# EAGLE board CT_schematic (EAGLE 7.6.0)

Size 100 x 80 mm. Coordinates in mm from the lower left corner, seen from the top.
Outline: 0,0 100,0 100,80 0,80 0,0
Copper layers (1*16): Top 0.035mm / dielectric 1.5mm / Bottom 0.035mm
Design rules "default": minimum track width 10mil, minimum drill 24mil, track to track 8mil, track to pad 8mil, pad to pad 8mil, via to via 8mil, smd to smd 8mil, copper to edge 40mil, drill to drill 8mil, minimum pad ring 10mil, minimum via ring 8mil, stop-mask expansion 4mil, vias tented up to drill 0mil, thermal gap 10mil

## Footprints (pad centres in the part's own frame; a part is rotated, then mirrored left to right if it is on the bottom)
C0603 = smd 0.8 x 0.8: 1 -0.762,0; 2 0.762,0
C0402 = smd 0.5 x 0.5: 1 -0.508,0; 2 0.508,0
C0805 = smd 1.2 x 1.3: 1 -1.016,0; 2 1.016,0
C1206 = smd 1.3 x 1.6: 1 -1.524,0; 2 1.524,0
L0603 = smd 0.8 x 0.8: 1 -0.762,0; 2 0.762,0
L0806 = smd 1.016 x 1.524: 1 -0.889,0; 2 0.889,0
R0603 = smd 0.8 x 0.8: 1 -0.762,0; 2 0.762,0
LQFP48 = smd 0.3 x 1.2: 1 -2.75,-4.25; 2 -2.25,-4.25; 3 -1.75,-4.25; 4 -1.25,-4.25; 5 -0.75,-4.25; 6 -0.25,-4.25; 7 0.25,-4.25; 8 0.75,-4.25; 9 1.25,-4.25; 10 1.75,-4.25; 11 2.25,-4.25; 12 2.75,-4.25; 25 2.75,4.25; 26 2.25,4.25; 27 1.75,4.25; 28 1.25,4.25; 29 0.75,4.25; 30 0.25,4.25; 31 -0.25,4.25; 32 -0.75,4.25; 33 -1.25,4.25; 34 -1.75,4.25; 35 -2.25,4.25; 36 -2.75,4.25 | smd 1.2 x 0.3: 13 4.25,-2.75; 14 4.25,-2.25; 15 4.25,-1.75; 16 4.25,-1.25; 17 4.25,-0.75; 18 4.25,-0.25; 19 4.25,0.25; 20 4.25,0.75; 21 4.25,1.25; 22 4.25,1.75; 23 4.25,2.25; 24 4.25,2.75; 37 -4.25,2.75; 38 -4.25,2.25; 39 -4.25,1.75; 40 -4.25,1.25; 41 -4.25,0.75; 42 -4.25,0.25; 43 -4.25,-0.25; 44 -4.25,-0.75; 45 -4.25,-1.25; 46 -4.25,-1.75; 47 -4.25,-2.25; 48 -4.25,-2.75
A2500R24A00GM = smd 1.5 x 0.61: 1 -3,7; 2 -3,6; 3 -3,5; 4 -3,4; 5 -3,3; 6 -3,2; 7 -3,1; 8 -3,0; 17 5.22,0; 18 5.22,1; 19 5.22,2; 20 5.22,3; 21 5.22,4; 22 5.22,5; 23 5.22,6; 24 5.22,7 | smd 0.61 x 1.5: 9 -2.39,-1.6; 10 -1.39,-1.6; 11 -0.39,-1.6; 12 0.61,-1.6; 13 1.61,-1.6; 14 2.61,-1.6; 15 3.61,-1.6; 16 4.61,-1.6 | smd 1 x 1: 25 -2.8,9; 26 -2.8,13; 27 5.02,9; 28 5.02,13; 29 0.11,5.75; 30 2.11,5.75
AT24C02D = smd 1.6 x 0.6: 1 -2.475,1.905 | smd 1.55 x 0.6: 2 -2.475,0.635; 3 -2.475,-0.635; 4 -2.475,-1.905; 5 2.475,-1.905; 6 2.475,-0.635; 7 2.475,0.635; 8 2.475,1.905
QFN-32 = smd 0.6 x 0.3: 1 -2.3,1.75; 2 -2.3,1.25; 3 -2.3,0.75; 4 -2.3,0.25; 5 -2.3,-0.25; 6 -2.3,-0.75; 7 -2.3,-1.25; 8 -2.3,-1.75; 17 2.3,-1.75; 18 2.3,-1.25; 19 2.3,-0.75; 20 2.3,-0.25; 21 2.3,0.25; 22 2.3,0.75; 23 2.3,1.25; 24 2.3,1.75 | smd 0.3 x 0.6: 9 -1.75,-2.3; 10 -1.25,-2.3; 11 -0.75,-2.3; 12 -0.25,-2.3; 13 0.25,-2.3; 14 0.75,-2.3; 15 1.25,-2.3; 16 1.75,-2.3; 25 1.75,2.3; 26 1.25,2.3; 27 0.75,2.3; 28 0.25,2.3; 29 -0.25,2.3; 30 -0.75,2.3; 31 -1.25,2.3; 32 -1.75,2.3 | smd 3.2 x 3.2: EXP 0,0
SJ-43515TS-SMT-TR = smd 2.2 x 3: 1 0.6,-7.4; 4 3.4,-7.4 | smd 3 x 3: 2 12.8,-7.4; 5 17,-3 | smd 2 x 3: 3 5.3,0; 6 2.5,0 | drill 1.8: P$7 4.5,-3.69; P$8 11.54,-3.69
WM-64PC = drill 0.6 pad 1: 1 -1,0.95; 2 -1,-0.95
FCI_10118193-0001LF = smd 0.4 x 1.35: 1 -1.3,2.675; 2 -0.65,2.675; 3 0,2.675; 4 0.65,2.675; 5 1.3,2.675 | smd 1.6 x 1.4: 6 -3.2,2.45; 7 3.2,2.45 | smd 1.9 x 1.9: 8 -1.2,0; 9 1.2,0 | hole 0.5: -3.3,0; 3.3,0
SOT143B = smd 1 x 0.7: 1 -0.75,-1 | smd 0.6 x 0.7: 2 0.95,-1; 3 0.95,1; 4 -0.95,1
ABLS-25.000MHZ-B2F-T = smd 5.6 x 2.8: 1 -3.81,0; 2 5.69,0
ASEK = smd 1.4 x 1: 1 -1.1,-0.8; 2 1.1,-0.8; 3 1.1,0.8; 4 -1.1,0.8
ASFL1 = smd 1.7 x 1.5: 1 -1.27,-1.1; 2 1.27,-1.1; 3 1.27,1.1; 4 -1.27,1.1
WSON-8 = smd 0.3 x 0.6: 1 -0.75,0; 2 0.05,0; 3 0.85,0; 4 1.65,0; 5 1.65,3.8; 6 0.85,3.8; 7 0.05,3.8; 8 -0.75,3.8 | smd 3 x 2.6: PAD 0.45,1.9
TSOT-23-5 = smd 1.3 x 0.62: 1 -1.31,0.95; 2 -1.31,0; 3 -1.31,-0.95; 4 1.31,-0.95; 5 1.31,0.95
DFN8_2X3MC = smd 0.813 x 0.305: 1 -1.398,0.75; 2 -1.398,0.25; 3 -1.398,-0.25; 4 -1.398,-0.75; 5 1.398,-0.75; 6 1.398,-0.25; 7 1.398,0.25; 8 1.398,0.75 | smd 1.753 x 1.549: 9 0,0
JST-2-SMD = smd 1 x 4.6: 1 -1,-3.7; 2 1,-3.7 | smd 1.6 x 3.4: NC1 -3.4,1.5; NC2 3.4,1.5
SON-6 = smd 0.55 x 0.3: 1 -0.355,0.5 | smd 0.52 x 0.3: 2 -0.37,0; 3 -0.37,-0.5; 4 0.37,-0.5; 5 0.37,0; 6 0.37,0.5
SW_4-1437565-2 = smd 1.4 x 2.1: 1 -2.23,4.55; 2 -2.23,-4.55; 3 2.23,4.55; 4 2.23,-4.55
LGM67K-G1J2-24-Z = smd 0.8 x 1.4: A -2,0; C 0,0
NC7SZ125M5X = smd 1.3 x 0.7: 1 -1.3,0.95; 2 -1.3,0; 3 -1.3,-0.95; 4 1.3,-0.95; 5 1.3,0.95

## Placement (x,y rotation side)
C1  1e-07  [C0603]  -73.66,81.28 0 top  (outside the outline)
C2  1e-07  [C0603]  -77.47,81.28 0 top  (outside the outline)
C3  1e-07  [C0603]  -81.28,81.28 0 top  (outside the outline)
C4  1e-07  [C0603]  -15.24,86.36 0 top  (outside the outline)
C5  4.7e-06  [C0603]  -69.85,81.28 0 top  (outside the outline)
C6  1e-08  [C0603]  -19.05,86.36 0 top  (outside the outline)
C7  1e-06  [C0603]  -22.86,86.36 0 top  (outside the outline)
C8  1e-07  [C0603]  -26.67,86.36 0 top  (outside the outline)
C9  1e-11  [C0402]  -38.1,91.44 0 top  (outside the outline)
C10  1e-11  [C0402]  -41.91,91.44 0 top  (outside the outline)
C11  1e-05  [C0805]  -34.29,74.93 0 top  (outside the outline)
C12  1e-08  [C0402]  -45.72,91.44 0 top  (outside the outline)
C13  1e-06  [C0603]  -30.48,86.36 0 top  (outside the outline)
C14  1e-06  [C0603]  -34.29,86.36 0 top  (outside the outline)
C15  1e-06  [C0603]  -38.1,86.36 0 top  (outside the outline)
C16  1e-06  [C0603]  -41.91,86.36 0 top  (outside the outline)
C17  1e-06  [C0603]  -45.72,86.36 0 top  (outside the outline)
C18  1e-06  [C0603]  -49.53,86.36 0 top  (outside the outline)
C19  1e-06  [C0603]  -53.34,86.36 0 top  (outside the outline)
C20  1e-07  [C0402]  -49.53,91.44 0 top  (outside the outline)
C21  1e-07  [C0402]  -53.34,91.44 0 top  (outside the outline)
C22  1e-07  [C0402]  -57.15,91.44 0 top  (outside the outline)
C23  1e-07  [C0402]  -60.96,91.44 0 top  (outside the outline)
C24  1e-06  [C0603]  -57.15,86.36 0 top  (outside the outline)
C25  1e-08  [C0402]  -64.77,91.44 0 top  (outside the outline)
C26  1e-08  [C0402]  -68.58,91.44 0 top  (outside the outline)
C27  1e-08  [C0402]  -72.39,91.44 0 top  (outside the outline)
C28  1e-05  [C0805]  -39.37,74.93 0 top  (outside the outline)
C29  1e-05  [C0805]  -44.45,74.93 0 top  (outside the outline)
C30  1e-05  [C0805]  -49.53,74.93 0 top  (outside the outline)
C31  1e-05  [C0805]  -54.61,74.93 0 top  (outside the outline)
C32  1e-07  [C0402]  -76.2,91.44 0 top  (outside the outline)
C33  1e-05  [C1206]  -80.01,66.04 0 top  (outside the outline)
C34  1e-05  [C1206]  -16.51,76.2 0 top  (outside the outline)
C35  1e-08  [C0402]  -80.01,91.44 0 top  (outside the outline)
F1  240.0  [L0603]  -60.96,86.36 0 top  (outside the outline)
I1  1.5e-06  [L0806]  -22.86,76.2 0 top  (outside the outline)
R1  10000.0  [R0603]  -25.4,81.28 0 top  (outside the outline)
R2  1000.0  [R0603]  -64.77,86.36 0 top  (outside the outline)
R3  1600.5  [R0603]  -68.58,86.36 0 top  (outside the outline)
R4  4700.0  [R0603]  -72.39,86.36 0 top  (outside the outline)
R5  2200.0  [R0603]  -76.2,86.36 0 top  (outside the outline)
R6  2200.0  [R0603]  -80.01,86.36 0 top  (outside the outline)
R7  10000.0  [R0603]  -30.48,81.28 0 top  (outside the outline)
R8  10000.0  [R0603]  -35.56,81.28 0 top  (outside the outline)
R9  10000.0  [R0603]  -40.64,81.28 0 top  (outside the outline)
R10  10000.0  [R0603]  -45.72,81.28 0 top  (outside the outline)
R11  10000.0  [R0603]  -50.8,81.28 0 top  (outside the outline)
R12  1270.0  [R0603]  -15.24,91.44 0 top  (outside the outline)
R13  1270.0  [R0603]  -19.05,91.44 0 top  (outside the outline)
R14  100000.0  [R0603]  -72.39,74.93 0 top  (outside the outline)
R15  200.0  [R0603]  -22.86,91.44 0 top  (outside the outline)
R16  1000.0  [R0603]  -26.67,91.44 0 top  (outside the outline)
R17  220000.0  [R0603]  -77.47,74.93 0 top  (outside the outline)
R18  1000000.0  [R0603]  -67.31,74.93 0 top  (outside the outline)
R19  10000.0  [R0603]  -55.88,81.28 0 top  (outside the outline)
R20  10000.0  [R0603]  -60.96,81.28 0 top  (outside the outline)
R21  9100.0  [R0603]  -30.48,91.44 0 top  (outside the outline)
R22  680000.0  [R0603]  -15.24,81.28 0 top  (outside the outline)
R23  120000.0  [R0603]  -20.32,81.28 0 top  (outside the outline)
R24  2000.0  [R0603]  -34.29,91.44 0 top  (outside the outline)
R25  10000.0  [R0603]  -66.04,81.28 0 top  (outside the outline)
U1  STM32L052C8T6  [LQFP48]  -69.85,45.72 0 top  (outside the outline)
U2  A2500R24A00GM  [A2500R24A00GM]  -27.94,7.62 0 top  (outside the outline)
U3  AT24C02D-SSHM-T  [AT24C02D]  -40.64,58.42 0 top  (outside the outline)
U4  SGTL5000XNAA3  [QFN-32]  -22.86,58.42 0 top  (outside the outline)
U5  SJ-43515TS-SMT-TR  [SJ-43515TS-SMT-TR]  -59.69,10.16 0 top  (outside the outline)
U6  SJ-43515TS-SMT-TR  [SJ-43515TS-SMT-TR]  -39.37,35.56 0 top  (outside the outline)
U7  SJ-43515TS-SMT-TR  [SJ-43515TS-SMT-TR]  -67.31,35.56 0 top  (outside the outline)
U8  WM-64PCT  [WM-64PC]  -54.61,45.72 0 top  (outside the outline)
U9  10118193-0001LF  [FCI_10118193-0001LF]  -19.05,67.31 0 top  (outside the outline)
U10  prtr5v0u2ax  [SOT143B]  -24.13,96.52 0 top  (outside the outline)
U11  ABLS-25.000MHZ-B2F-T  [ABLS-25.000MHZ-B2F-T]  -57.15,67.31 0 top  (outside the outline)
U12  ASEK-32.768KHz-ECST  [ASEK]  -40.64,67.31 0 top  (outside the outline)
U13  ASFL-24.57MHZ-NCS  [ASFL1]  -80.01,57.15 0 top  (outside the outline)
U14  LP3878SDX-ADJ/NOPB  [WSON-8]  -62.23,55.88 0 top  (outside the outline)
U15  ltc3406es5  [TSOT-23-5]  -59.69,74.93 0 top  (outside the outline)
U16  MCP73831T-2ACI/MC  [DFN8_2X3MC]  -34.29,95.25 0 top  (outside the outline)
U17  S2B-PH-SM4-TB(LF)(SN)  [JST-2-SMD]  -41.91,46.99 0 top  (outside the outline)
U18  TPS3895ADRYR  [SON-6]  -27.94,95.25 0 top  (outside the outline)
U19  4-1437565-2  [SW_4-1437565-2]  -27.94,46.99 0 top  (outside the outline)
U20  Q65110A2395  [LGM67K-G1J2-24-Z]  -68.58,67.31 0 top  (outside the outline)
U21  nc7sz125m5x  [NC7SZ125M5X]  -27.94,74.93 0 top  (outside the outline)

## Library data of the parts
C1-C35 F1 I1 R1-R25 U1-U21 = circuit_tree

## Nets
CLK_CRYSTAL_U1_5: C9.1 U1.5 U11.1
CLK_CRYSTAL_U1_6: C10.1 U1.6 U11.2
CLK_U1_3: U1.3 U12.3
CLK_U4_21: U4.21 U13.3
GND: C1.2 C2.2 C3.2 C4.2 C5.2 C6.2 C7.2 C8.2 C9.2 C10.2 C11.2 C12.2 C20.2 C21.2 C22.2 C23.2 C24.2 C25.2 C26.2 C27.2 C28.2 C29.2 C30.2 C31.1 C31.2 C32.2 C33.2 C34.2 C35.2 R2.2 R7.2 R8.2 R10.2 R11.2 R13.2 R16.2 R17.2 R21.2 R23.2 R24.2 U1.8 U1.23 U1.35 U1.47 U2.8 U2.17 U3.4 U4.1 U4.3 U4.7 U4.EXP U6.1 U7.1 U8.2 U9.5 U9.6 U9.7 U9.8 U9.9 U10.1 U12.2 U13.2 U14.3 U14.PAD U15.2 U16.6 U16.9 U17.2 U18.2 U20.C U21.1 U21.3
INPUT_USBPOWER_5V: C33.1 R25.2 U9.1 U10.4 U16.1 U16.2
NET_U1_7: R4.1 U1.7 U21.4
NET_U1_9: C6.1 C7.1 F1.1 U1.9
NET_U1_42: R5.1 U1.42 U3.6
NET_U1_43: R6.1 U1.43 U3.5
NET_U1_44: R7.1 U1.44
NET_U1_45: R3.1 U1.45 U20.A
NET_U1_46: R1.1 U1.46 U19.3 U19.4
NET_U3_1: R9.1 U3.1
NET_U3_2: R10.1 U3.2
NET_U3_3: R11.1 U3.3
NET_U3_7: R8.1 U3.7
NET_U4_10: C23.1 U4.10
NET_U4_29: R12.1 U4.29
NET_U4_31: R13.1 U4.31
NET_U5_1: U4.4 U5.1
NET_U5_2: U4.2 U5.2
NET_U5_5: U4.6 U5.5
NET_U6_2: C14.1 U6.2
NET_U6_5: C13.1 U6.5
NET_U6_11: C14.2
NET_U6_12: C13.2
NET_U7_2: C16.1 C17.1 U7.2
NET_U7_5: C15.1 U7.5
NET_U7_13: C16.2 C17.2
NET_U7_14: C15.2
NET_U8_1: C18.1 C19.1 C24.1 U4.16 U8.1
NET_U8_15: C18.2 C19.2
NET_U14_1: C27.1 U14.1
NET_U14_6: R15.2 R16.1 U14.6
NET_U14_8: R14.1 U14.8
NET_U15_1: U15.1
NET_U15_3: I1.1 U15.3
NET_U15_5: R17.1 R18.1 U15.5
NET_U15_ATNET_3: I1.2 R18.2
NET_U16_5: R25.1 U16.5
NET_U16_8: R24.1 U16.8
NET_U18_1: R20.1 R21.1 U18.1
NET_U18_3: R22.2 R23.1 U18.3
NET_U18_4: R19.1 U18.4 U21.2
NET_U19_1: R2.1 U19.1 U19.2
PROC_I2S2_CK: U1.26 U4.24
PROC_I2S2_SD: U1.28 U4.26
PROC_I2S2_WS: U1.25 U4.23
PROC_SPI1_MISO: U1.16 U2.10
PROC_SPI1_MOSI: U1.17 U2.11
PROC_SPI1_NSS: U1.14 U2.12
PROC_SPI1_SCK: U1.15 U2.9
PROC_USB_DM: U1.32 U9.2 U10.3
PROC_USB_DP: U1.33 U9.3 U10.2
VCC_S1_3V7: C28.1 C30.1 C34.1 R14.2 U14.4 U15.4 U16.3 U16.4 U17.1
VCC_TIER1_1V2: C20.1 C29.1 R15.1 U4.30 U14.5
VCC_TIER1_3V3: C1.1 C2.1 C3.1 C4.1 C5.1 C8.1 C11.1 C12.1 C21.1 C22.1 C25.1 C26.1 C31.2 C32.1 C35.1 F1.2 I1.2 R1.2 R3.2 R4.2 R5.2 R6.2 R9.2 R12.2 R18.2 R19.2 R20.2 R22.1 U1.1 U1.24 U1.36 U1.48 U2.18 U3.8 U4.5 U4.20 U12.4 U13.4 U18.6 U21.5

## Tracks (layer width: path | path; a pad name or v marks a point on that pad's centre or on a via)
CLK_CRYSTAL_U1_5  (2 unrouted)
CLK_CRYSTAL_U1_6  (2 unrouted)
CLK_U1_3  (1 unrouted)
CLK_U4_21  (1 unrouted)
GND  (71 unrouted)
INPUT_USBPOWER_5V  (5 unrouted)
NET_U1_7  (2 unrouted)
NET_U1_9  (3 unrouted)
NET_U1_42  (2 unrouted)
NET_U1_43  (2 unrouted)
NET_U1_44  (1 unrouted)
NET_U1_45  (2 unrouted)
NET_U1_46  (3 unrouted)
NET_U3_1  (1 unrouted)
NET_U3_2  (1 unrouted)
NET_U3_3  (1 unrouted)
NET_U3_7  (1 unrouted)
NET_U4_10  (1 unrouted)
NET_U4_29  (1 unrouted)
NET_U4_31  (1 unrouted)
NET_U5_1  (1 unrouted)
NET_U5_2  (1 unrouted)
NET_U5_5  (1 unrouted)
NET_U6_2  (1 unrouted)
NET_U6_5  (1 unrouted)
NET_U7_2  (2 unrouted)
NET_U7_5  (1 unrouted)
NET_U7_13  (1 unrouted)
NET_U8_1  (4 unrouted)
NET_U8_15  (1 unrouted)
NET_U14_1  (1 unrouted)
NET_U14_6  (2 unrouted)
NET_U14_8  (1 unrouted)
NET_U15_3  (1 unrouted)
NET_U15_5  (2 unrouted)
NET_U15_ATNET_3  (1 unrouted)
NET_U16_5  (1 unrouted)
NET_U16_8  (1 unrouted)
NET_U18_1  (2 unrouted)
NET_U18_3  (2 unrouted)
NET_U18_4  (2 unrouted)
NET_U19_1  (2 unrouted)
PROC_I2S2_CK  (1 unrouted)
PROC_I2S2_SD  (1 unrouted)
PROC_I2S2_WS  (1 unrouted)
PROC_SPI1_MISO  (1 unrouted)
PROC_SPI1_MOSI  (1 unrouted)
PROC_SPI1_NSS  (1 unrouted)
PROC_SPI1_SCK  (1 unrouted)
PROC_USB_DM  (2 unrouted)
PROC_USB_DP  (2 unrouted)
VCC_S1_3V7  (8 unrouted)
VCC_TIER1_1V2  (4 unrouted)
VCC_TIER1_3V3  (39 unrouted)